# Altium PCB PCB.PcbDoc (part 2 of 2)
Units mil, origin at the board's own origin, x right, y up, seen from the top; angles counter-clockwise.
Board outline 981 x 1306 mil, 4 copper layers (Top Layer, GND, POWER, Bottom Layer), stack 45.84 mil thick; 102 components, 94 nets, 433 pads, 136 vias.
Unrouted connection lines stored in the file: 65.
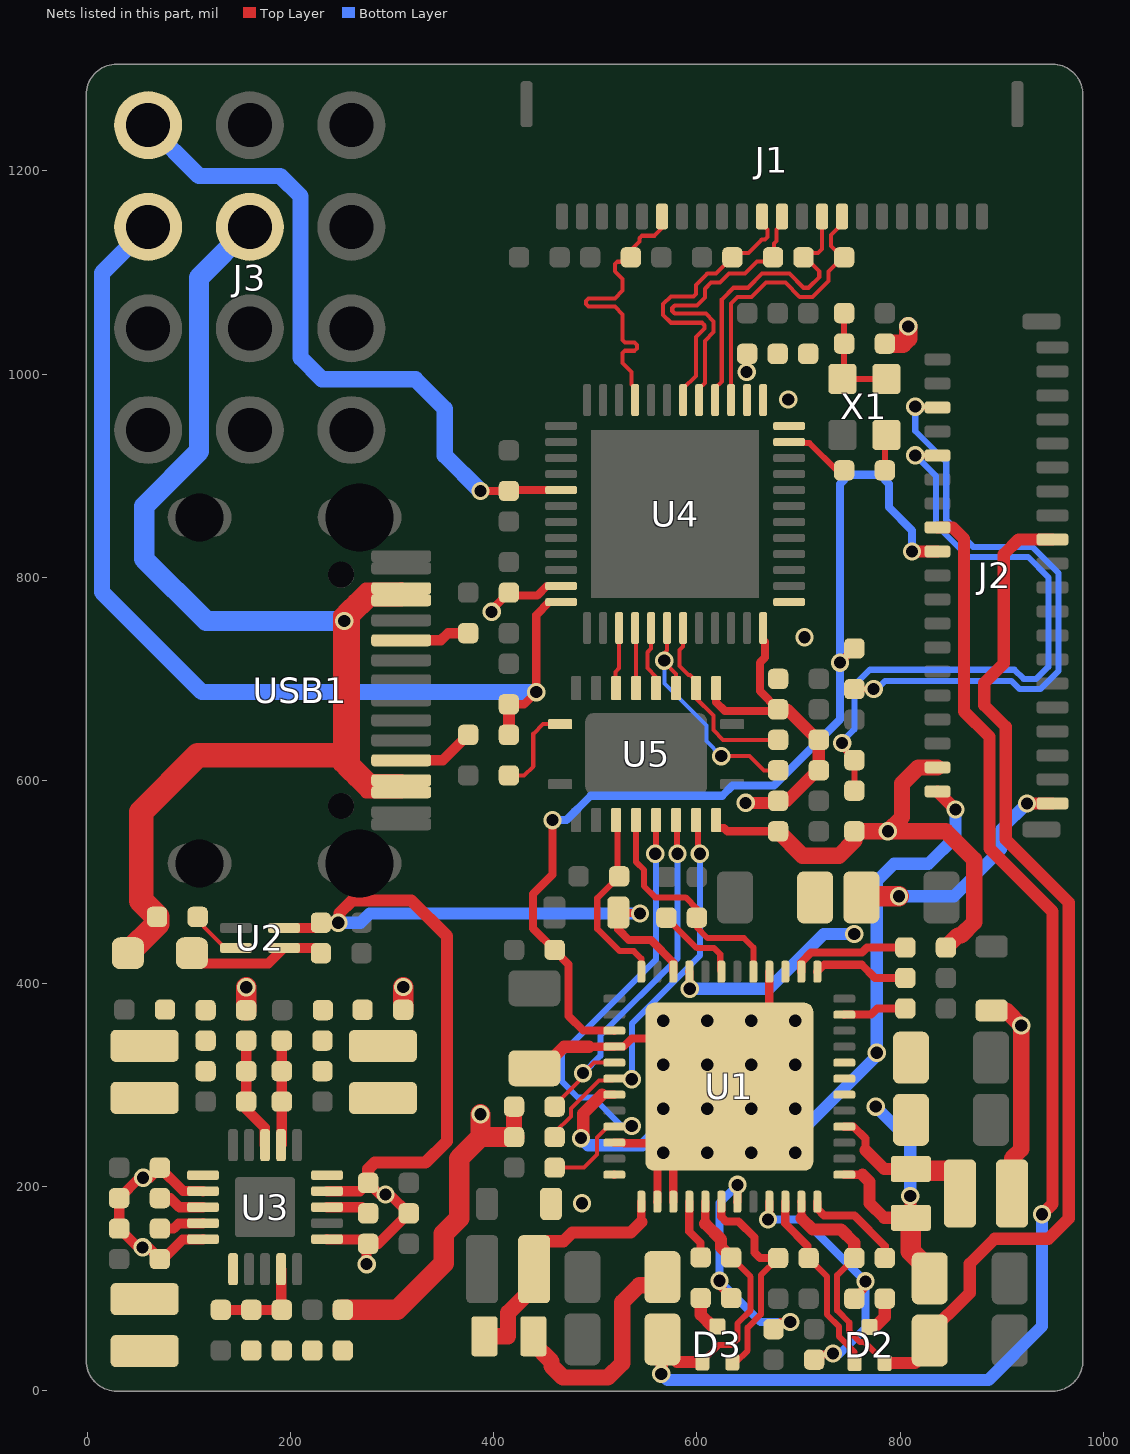
[diagram p4: the nets of this part, all layers, seen from the top]

## Via types
v1: diameter 18, hole 12, Top Layer to Bottom Layer, tented both sides, 98 vias
v2: diameter 19.68, hole 12, Top Layer to Bottom Layer, 38 vias

## Nets (pads, with @x,y where several pads share a name; then routed paths per layer and width w, separated by ;. In a path a pad name is that pad's centre, name@x,y a point inside that pad or via, vN(x,y) a via of type N, cw(c..) or ccw(c..) an arc to the next point about the centre after c; other vN are vias at no path point) (continued)
MIPI_D1_P: J1.17 R26.2 U4.45 | length 302.9
  Top Layer w4: U4.45@539.25,974.41 539.25,986.22 535.88,989.59 535.88,1002.12 527,1011 527,1015 527,1020.6 529.4,1023 538.6,1023 541,1025.4 541,1028.6 538.6,1031 529.4,1031 527,1033.4 527,1034.9 527,1058.8 519.26,1066.54 493.31,1066.54 490.84,1069 490.84,1072.07 493.31,1074.54 519.26,1074.54 527,1082.27 527,1093.72 519.5,1101.22 519.5,1108.26 521.84,1110.6 530.6,1110.6 R26.2@535,1115 535.16,1115 535.16,1121.94 543.7,1130.49 543.7,1133.7 546.2,1136.2 558.2,1136.2 565.68,1143.68 J1.17@565.68,1155
MIPI_D2_N: J1.12 R27.1 U4.42 | length 284.1
  Top Layer w4: U4.42@586.5,985.68 599,998.18 599,1036.46 607.54,1045 607.54,1048.07 605.07,1050.54 574.53,1050.54 566.79,1058.27 566.79,1068.8 574.53,1076.54 596.54,1076.54 599,1079 599,1087.73 610.27,1099 619,1099 R27.1@635,1115 639.4,1119.4 650.77,1119.4 663.91,1132.54 667.11,1132.54 669.45,1134.89 669.45,1142.25 664.11,1147.59 J1.12@664.11,1155
MIPI_D2_P: J1.11 R27.2 U4.41 | length 300
  Top Layer w4: U4.41@602.24,974.41 602.24,985.68 608,991.43 608,1032.73 616.54,1041.27 616.54,1051.8 608.8,1059.54 578.26,1059.54 575.79,1062 575.79,1065.07 578.26,1067.54 600.26,1067.54 607,1074.27 608,1075.27 608,1084 614,1090 622.73,1090 631.73,1099 647.38,1099 659,1110.62 670.62,1110.62 R27.2@675,1115 675.95,1115.95 675.95,1128.66 678.45,1131.16 678.45,1142.25 683.8,1147.59 J1.11@683.8,1155
MIPI_D3_N: J1.9 R28.1 U4.40 | length 295.8
  Top Layer w4: U4.40@617.99,978.84 617.99,986.22 624.54,992.77 624.54,1073.28 636.25,1085 650.27,1085 664.27,1099 691,1099 705,1085 710,1085 720.5,1095.5 720.5,1101 709.4,1112.1 R28.1@709.4,1119.4 ; R28.1@705,1115 R28.1@709.4,1119.4 ; J1.9@723.17,1155 723.17,1123.17 719.4,1119.4 R28.1@709.4,1119.4
MIPI_D3_P: J1.8 R28.2 U4.39 | length 296.4
  Top Layer w4: U4.39@633.74,974.41 633.54,974.61 633.54,1069.56 639.98,1076 654,1076 668,1090 687.27,1090 701.27,1076 713.73,1076 729.5,1091.77 729.5,1101 742.85,1114.35 R28.2@742.85,1115.35 ; R28.2@742.85,1117.5 R28.2@742.85,1115.53 ; J1.8@742.85,1155 742.85,1147.59 732.17,1136.91 732.17,1126.21 R28.2@742.85,1115.53 ; R28.2@742.85,1115.35 R28.2@743.03,1115.35 ; R28.2@742.85,1115.35 R28.2@742.85,1115.53 ; R28.2@742.85,1115.53 R28.2@743.03,1115.35 ; R28.2@743.03,1115.35 743.38,1115 R28.2@745,1115 745,1115.35 R28.2@743.03,1115.35
NetC1_2: C1.2 U1.1 | length 94.8
  Top Layer w8: U1.1@718.56,411.81 725.39,418.64 762.36,418.64 775.4,405.6 C1.2@805.14,405.6
NetC6_2: C6.2 U1.7 | length 85.5
  Top Layer w6: C6.2@570,465 600,435 617,435 623,429 623,412.89 U1.7@624.07,411.81
NetC11_1: C11.1 U1.36 | length 100.4
  Top Layer w8: U1.36@718.56,185.43 718.56,178.67 725.23,172 755,172 785,142 C11.1@785,130
NetC11_2: C11.2 D2.3 | length 37.9
  Top Layer w12: D2.3@770,62.12 775.12,62.12 785,72 785,88 786,89 C11.2@785,90
NetC13_1: C13.1 D2.1 U1.34 | length 186.6
  Top Layer w6: C13.1@710,130 727.99,112.01 727.99,74.41 740,62.4 740,52.63 755.24,37.39 D2.1@755.24,26.68
  Top Layer w8: U1.34@687.07,185.43 687.07,163.93 709,142 C13.1@709,130
NetC15_1: C15.1 D3.2 U1.30 | length 216.4
  Top Layer w6: D3.2@638.36,27.28 650,38.93 650,61.54 662.99,74.53 662.99,99.97 662.99,113 C15.1@679.99,130
  Top Layer w8: U1.30@624.07,185.43 624.01,185.37 624.01,170.69 628.7,166 641,166 656.6,150.4 656.6,135.4 662,130 C15.1@679.99,130
NetC16_1: C16.1 U1.28 | length 59.5
  Top Layer w8: U1.28@592.58,185.43 592.58,156.2 603.78,145 C16.1@603.78,130.6
NetC16_2: C16.2 D3.3 | length 37.5
  Top Layer w12: C16.2@603.78,90.6 603.78,74.22 615.28,62.72 D3.3@620.15,62.72
NetC21_2: C21.2 FB1.1 U2.3 | length 139.6
  Top Layer w10: FB1.1@102.99,430 112.99,420 178.46,420 U2.3@193.62,435.16 224.84,435.16 C21.2@230,430
NetC22_2: C22.2 C23.2 FB2.2 L3.1 R15.2
NetC23_1: C23.1 R15.1 R16.1 U3.14 | length 100.3
  Top Layer w10: R16.1@131.5,78.98 R15.1@161.51,78.98 C23.1@191.52,78.98 191.02,79.47 191.02,118.7 U3.14@190.75,118.98
NetC28_2: C28.2 C29.2 FB3.2 L4.1 R17.2
NetC29_1: C29.1 R17.1 R20.1 U3.3 | length 110.6
  Top Layer w9: U3.3@174.78,241.25 U3.3@175,241.02
  Top Layer w10: C29.1@156.5,344 R17.1@156.5,313.99 R20.1@156.5,283.98 156.5,276.5 174.78,258.22 U3.3@174.78,241.25
NetC30_2: C30.2 C31.2 FB4.2 L5.1 R22.2
NetC31_1: C31.1 R22.1 R25.1 U3.2 | length 103.3
  Top Layer w10: U3.2@190.75,241.02 191.5,241.77 R25.1@191.5,283.98 R22.1@191.5,313.99 C31.1@191.5,344
NetC33_1: C33.1 FB5.1 X1.1 X1.4 | length 108.8
  Top Layer w6: C33.1@745,1060 FB5.1@745,1029.99 745,996.87 X1.1@743.35,995.22 X1.4@786.65,995.22
NetD1_2: D1.2 L1.1 U1.40 | length 156.4
  Top Layer w8: U1.40@745.14,259.25 754.31,259.25 766,247.57 766,236
  Top Layer w12: 766,236 784.4,217.59 D1.2@810.61,217.59
  Top Layer w16: D1.2@810.61,217.59 D1.2@812.27,215.93 ; L1.1@851.21,215.93 858.96,208.18 L1.1@858.96,193.52
  Top Layer w20: D1.2@812.27,215.93 L1.1@851.21,215.93
NetD4_1: D4.1 L2.1 U1.25 | length 255
  Top Layer w8: 545.33,165.33 U1.25@545.33,185.43
  Top Layer w12: L2.1@439.93,119.06 439.93,136.77 449.68,146.52 468.85,146.52 477.32,155 535,155 545.33,165.33
  Top Layer w16: D4.1@390.98,52.99 414.22,52.99 414.22,76.15 439.93,101.86 L2.1@439.93,119.06
NetJ2_30: J2.30 R31.2 R32.2 | length 638.4
  Top Layer w6: v1(743,637) 745.3,634.7 745.3,630.79 755,621.08 R32.2@755,620 R31.2@755,590 ; v1(815,920) v1(815,920) 836.77,919.96 J2.30@836.81,919.92
  Bottom Layer w6: v1(743,637) 743,638.46 755,650.46 755,693.63 770.37,709 912.5,709 912.64,709.13 921.77,700 934,700 946,712 946,800 926,820 867,820 835.5,851.5 835.5,899.5 v1(815,920)
NetJ2_34: J2.34 R33.2 | length 589.8
  Top Layer w6: R33.2@755,690 v1(774,690) ; v1(815,968) 815.42,967.58 836.39,967.58 J2.34@836.81,967.17
  Bottom Layer w6: v1(774,690) 777.25,690 785.25,698 909.63,698 917.63,690 938.14,690 956,707.86 956,804.14 930.14,830 872,830 845.5,856.5 845.5,913.5 815,944 v1(815,968)
NetL3_2: L3.2 U3.11
NetL4_2: L4.2 U3.6
NetL5_2: L5.2 U3.20
NetR1_1: R1.1 U1.2 | length 117.6
  Top Layer w8: U1.2@702.81,411.81 702.81,420.99 712.47,430.64 762.64,430.64 767.61,435.61 R1.1@805.14,435.61
NetR2_2: R2.2 U1.47 | length 62.5
  Top Layer w8: U1.47@745.14,369.49 745.2,369.55 771.55,369.55 777.59,375.59 R2.2@805.14,375.59
NetR6_1: R6.1 R7.2 U1.33 | length 276.5
  Top Layer w8: U1.33@671.32,185.43 U1.33@671.32,185.43 v1@671.26,171.83 ; R7.2@715.43,29.99 720.44,35 v1@736,35 ; R6.1@754.99,90 754.99,90.54 764.09,99.64 764.09,105.09 v1(766,107) ; v1@671.26,171.83 670.07,170.64 v1(670.07,167.93) 671.26,169.12 v1@671.26,171.83
  Bottom Layer w8: v1(670.07,167.93) 705.07,167.93 v1(766,107) 766,61 739.5,34.5 v1@734.25,34.5
  other v1: 734,36
NetR9_1: R9.1 R10.2 U1.31 | length 246.2
  Top Layer w8: v1(622.23,107.6) 624.14,105.69 624.14,100.78 633.79,91.14 R9.1@633.79,90.6 ; U1.31@639.82,185.43 639.89,185.5 639.89,201.89 v1(640,202) ; R10.2@675.43,60 682.43,67 v1(692,67)
  Bottom Layer w8: v1(640,202) 622.23,184.23 v1(622.23,107.6) 662.83,67 v1(692,67)
NetR12_1: R12.1 USB1.A5 | length 68.8
  Top Layer w10: USB1.A5@309.06,737.99 347.99,737.99 355,745 R12.1@375,745
NetR13_2: R13.2 USB1.B5 | length 76.4
  Top Layer w10: USB1.B5@309.06,619.88 350,619.88 350,620 R13.2@375,645
NetR14_1: R14.1 U2.2 | length 52.5
  Top Layer w4: R14.1@108.73,465.75 114.88,459.6 114.88,455.83 135.55,435.16 U2.2@146.38,435.16
NetR18_2: R18.2 U3.9 | length 44.7
  Top Layer w10: R18.2@71.5,158.98 85,158.98 90,163.98 113.7,163.98 U3.9@113.98,164.25
NetR19_2: R19.2 U3.8 | length 46.2
  Top Layer w10: R19.2@71.5,188.99 81.71,188.99 90.69,180 U3.8@113.98,180
NetR21_2: R21.2 U3.18 | length 43
  Top Layer w10: U3.18@236.02,180 270.47,180 R21.2@276.5,173.98
NetR30_2: R30.2 X1.3 | length 35.5
  Top Layer w6: R30.2@785,905.32 785,938.44 X1.3@786.65,940.1
NetR34_1: R34.1 U5.10 | length 90.2
  Top Layer w4: R34.1@415,604.99 429.99,604.99 439,614 439,646 448.55,655.55 U5.10@465.51,655.55
SYS_CLK: R30.1 U4.35 | length 65.7
  Top Layer w6: U4.35@690.83,933.07 691.76,932.13 710.87,932.13 737.68,905.32 R30.1@745,905.32
TPS_PWRUP: R11.1 U1.21 U5.16 | length 486.3
  Top Layer w4: R11.1@460.14,219.02 489.02,219.02 501.93,231.93 501.93,248.77 512.41,259.25 U1.21@518.76,259.25 519.13,259.63 535.63,259.63 v1(536,260)
  Top Layer w6: v1(559,528) 559,529 560,530 560,532 U5.16@560,561.06
  Bottom Layer w6: v1(536,260) 535.79,260.21 525.79,260.21 498,288 483,288 467,304 467,331 560,424 560,527 v1(559,528)
TPS_PWRUP_F: U4.17 U5.5 | length 64.2
  Top Layer w4: U4.17@555,750 555,730 551.24,726.24 551.24,710.76 560,702 U5.5@560,690.98
TPS_SCL: R5.1 U1.17 U5.17 | length 369.8
  Top Layer w4: R5.1@460.14,279.04 460.14,280.67 472,292.53 489.74,310.26 v1@491.87,312.4 ; v1(488,312) 488.72,312 498.97,322.24 U1.17@518.76,322.24 U1.17@518.88,322.12
  Top Layer w6: U5.17@579.69,561.06 580.34,560.41 580.34,528.66 v1(581,528)
  Bottom Layer w6: v1(488,312) 505,329 505,349 581,425 v1(581,528)
TPS_SCL_F: R35.1 U4.18 U5.4 | length 244
  Top Layer w4: U4.18@570.75,750 570.75,728.19 568,725.44 v1(568,718) 568,716.47 579.69,704.79 U5.4@579.69,690.98 ; v1(624,624) 652,624 665.99,610.01 R35.1@680,610.01
  Bottom Layer w4: v1(568,718) 568,695.55 609.31,654.24 609.31,638.69 v1(624,624)
TPS_SDA: R8.1 U1.18 U5.18 | length 391.3
  Top Layer w4: R8.1@460.14,249.03 460.14,253.49 476.14,269.49 476.14,277.11 503.59,304.56 516.82,304.56 U1.18@518.76,306.5 519.01,306.25 535.75,306.25 v1(536,306)
  Top Layer w6: U5.18@599.37,561.06 601.19,559.25 601.19,529.81 v1(603,528)
  Bottom Layer w6: v1(536,306) 536,360.63 603,427.63 v1(603,528)
TPS_SDA_F: R36.1 U4.19 U5.3 | length 184.3
  Top Layer w4: U4.19@586.5,750 586.5,732 583,728.5 583,712.79 591.79,704 593.24,704 599.37,697.87 599.37,680.96 616.2,664.14 616.2,649.52 625.7,640.01 R36.1@680,640.01
TPS_VCOM: R4.1 U1.12 U5.14 | length 185.5
  Top Layer w6: U5.14@520.63,561.06 522.08,559.62 522.08,507.2 R4.1@523.52,505.75 502,484.23 502,454 524,432 538,432 545.33,424.67 U1.12@545.33,411.81
TPS_VCOM_F: U4.15 U5.7 | length 60.7
  Top Layer w4: U5.7@520.63,690.98 520,691.61 520,707 523.5,710.5 U4.15@523.5,750
TPS_WAKEUP: R3.1 U1.5 U5.15 | length 235.5
  Top Layer w6: U5.15@540.32,561.06 540.32,519.68 548,512 548,496 559,485 589,485 600.01,473.99 R3.1@600.01,465 600.01,455.46 610.47,445 646.21,445 655.57,435.64 U1.5@655.57,411.81
TPS_WAKEUP_F: U4.16 U5.6 | length 59.5
  Top Layer w4: U4.16@539.25,750 539.25,741.06 540.32,740 U5.6@540.32,690.98
VB_OUT: C7.1 C9.1 D1.1 U1.37 U1.42 U1.43 | length 287.4
  Top Layer w8: U1.37@745.14,212.01 745.2,211.95 763.06,211.95
  Top Layer w12: 763.06,211.95 770,205 770,184 784.44,169.56 D1.1@810.61,169.56 810.3,169.87 810.3,190.7 v1(810,191)
  Top Layer w16: D1.1@809.92,168.87 D1.1@810.61,169.56
  Top Layer w20: D1.1@810.61,169.56 810.61,136.49 829.22,117.87 C9.1@829.22,110
  Bottom Layer w12: v1(776,279) 810,245 v1(810,191)
VBUS: FB1.2 J3.5 R14.2 USB1.A4 USB1.A9 USB1.B4 USB1.B9 | length 1840.2
  Top Layer w12: USB1.A9@309.06,588.39 308.96,588.48 274.52,588.48 262.8,600.2 ; USB1.A4@309.06,789.17 308.96,789.08 274.08,789.08 262.36,777.36 ; 248,632 248,624.82 248,615 255.18,607.82 ; 248,632 255.18,624.82 ; 248,632 248,746 ; 248,746 248,763 255.18,770.18 ; 248,746 v1@255.18,753.18 ; 255.18,607.82 262.36,600.64 ; 255.18,607.82 255.18,624.82 ; 255.18,624.82 262.36,617.64 ; 255.18,624.82 v1@255.18,753.18 ; v1@255.18,753.18 255.18,770.18 ; v1@255.18,753.18 262.36,760.36 ; 255.18,770.18 262.36,777.36 ; 262.36,600.64 262.8,600.2 ; 262.36,600.64 262.36,617.64 ; 262.36,617.64 262.36,760.36 ; 262.36,617.64 279.71,600.29 308.96,600.29 USB1.B4@309.06,600.2 262.8,600.2 ; 262.36,760.36 279.27,777.27 308.96,777.27 USB1.B9@309.06,777.36 262.36,777.36 ; 262.36,760.36 262.36,777.36
  Top Layer w24: FB1.2@40,430 68.73,458.73 R14.2@68.73,465.75 53,481.48 53,569 108.82,624.82 248,624.82
  Bottom Layer w20: J3.5@160,1145 110,1095 110,924 56,870 56,818 117,757 v1(253,757)
VCC_1V2: C36.2 C38.2 C39.2 FB3.1 U4.11 U4.37 U4.38 | length 105.1
  Top Layer w8: v1(398,766) 398,767.99 C36.2@415,784.99 418,782 442.98,782 452.32,791.34 U4.11@466.42,791.34
  Top Layer w20: FB3.1@156.5,374.01 v1(156.5,396.5)
  other v1: 649,1002
VCC_1V8: C37.2 C40.2 C42.1 FB4.1 J3.4 R34.2 R35.2 R36.2 U4.12 U4.24 U5.2 | length 1365.4
  Top Layer w8: C37.2@415,674.99 429.99,674.99 v1(442,687) 442,763.03 454.56,775.59 U4.12@466.42,775.59 ; U5.2@619.06,690.98 619,690.93 619,677 627.53,668.47 678.45,668.47 C42.1@680,670.02 662,688.02 662,715.96 667,720.96 667,736.55 U4.24@665.3,738.25
  Top Layer w12: R34.2@415,644.99 C37.2@415,674.99 ; v1(648,578) 682,578 C40.2@680,580 688.79,580 720,611.21 R36.2@720,640.01 718.8,640.01 688.79,670.02 C42.1@680,670.02
  Top Layer w20: FB4.1@311,374.35 v1(311,396.84)
  Bottom Layer w16: J3.4@60,1145 14.54,1099.54 14.54,785.46 113,687 v1(442,687)
VCC_3V3: C32.1 C34.2 C35.1 C41.2 FB2.1 FB5.2 J2.4 J3.1 R1.2 R5.2 R8.2 R31.1 U4.5 U4.25 U4.36 U5.19 | length 1549.3
  Top Layer w8: v1(387,885) C34.2@415,885 415.76,885.76 U4.5@466.42,885.83 U4.5@466.42,885.83 ; U5.19@619.06,561.06 619.06,554.17 619.98,553.25 626.87,553.25 630.12,550 C41.2@680,550
  Top Layer w16: R8.2@420.14,249.03 R5.2@420.14,279.04 ; C41.2@680,550 704,526 740,526 755,541 R31.1@755,550 v1(788,550) ; J2.4@836.81,612.83 817.83,612.83 802,597 802,564 v1(788,550) ; R1.2@845.14,435.61 856.93,447.41 859.98,447.41 873,460.43 873,522 845,550 v1(788,550)
  Top Layer w18: FB5.2@785,1029.99 802.99,1029.99 808,1035 v1(808,1047)
  Top Layer w20: FB2.1@251.54,78.98 304.98,78.98 351,125 351,154 366,169 366,228 387.03,249.03 ; v1(387.03,271.52) 387.03,249.03 ; R8.2@420.14,249.03 387.03,249.03
  Bottom Layer w16: J3.1@60,1245 110,1195 190,1195 210,1175 210,1016 231,995 323,995 352,966 352,920 v1(387,885)
  other v1: 706,741 690,975
VCOM: C12.2 J2.22 R33.1 U1.15 | length 998.4
  Top Layer w8: v1(458,561) 458,507.29 438.88,488.18 438.88,454.47 C12.2@460.14,433.22 460.14,432.68 473.73,419.09 473.73,368.27 488.2,353.8 518.7,353.8 U1.15@518.76,353.74 ; v1(741,716) R33.1@755,730
  Top Layer w12: v1(811.81,825.43) J2.22@836.81,825.43
  Bottom Layer w8: v1(458,561) 471.53,561 495.53,585 625,585 635,595 676,595 741,660 v1(741,716) 741,892 750,901 780,901 789,892 789,869 811.81,846.19 v1(811.81,825.43)
VGH: C10.1 D2.2 J2.23 R6.2 U1.35 | length 1242
  Top Layer w6: R6.2@754.99,130 737.99,113 737.99,78.55 750,66.54 750,57.85 760.61,47.24 765.19,47.24 784.76,27.67 D2.2@784.76,26.68
  Top Layer w8: U1.35@702.81,185.43 702.88,185.37 702.88,169.12
  Top Layer w12: 702.88,169.12 714,158 742,158 754.99,145.01 R6.2@754.99,130 ; D2.2@784.76,26.68 814.85,26.68 829.22,41.06 C10.1@829.22,48.82 829.22,56.59 847.04,74.41 847.45,74.41 868.59,95.55 868.59,124.45 893.15,149 946,149 966,169 966,480 904,542 904,653 882.94,674.06 882.94,695.94 902.15,715.15 902.15,822.73 916.57,837.15 949.91,837.15 J2.23@950,837.24
VGL: C19.2 D3.1 J2.24 R9.2 U1.29 | length 1537
  Top Layer w6: D3.1@605.39,27.28 605.39,28.27 621.35,44.23 634.23,44.23 640,50 640,65.68 652.99,78.67 652.99,104.11 652.99,111.4 R9.2@633.79,130.6
  Top Layer w8: 608.33,163.67 U1.29@608.33,185.43
  Top Layer w12: v1(565,16) 565.53,16.53 565.53,49.47 C19.2@566.06,50 566.06,42.23 580.5,27.79 604.88,27.79 D3.1@605.39,27.28 ; 608.33,163.67 623.78,148.22 623.78,140.61 R9.2@633.79,130.6 ; J2.24@836.81,849.06 851.94,849.06 863,838 863,668 888,643 888,533 950,471 950,183.21 v1(939.8,173.01)
  Bottom Layer w12: v1(565,16) 571,10 887,10 939.8,62.8 v1(939.8,173.01)
VIN: C5.1 C8.2 C17.2 C20.1 C24.2 C25.2 C26.2 C27.2 L1.2 R18.1 R19.1 R21.1 U1.10 U1.24 U2.4 U3.7 U3.10 U3.16 U3.19 | length 1559.5
  Top Layer w8: U1.24@518.7,211.95 U1.24@518.76,212.01 ; v1(544,469) 543.5,469.5 524.2,469.5 523.7,469 C8.2@522.7,470 522.7,453.3 533,443 554.82,443 576.77,421.05 576.77,411.87 U1.10@576.83,411.81
  Top Layer w10: U3.10@113.98,148.5 113.7,148.23 94.05,148.23 74.8,128.98 C25.2@71.5,128.98 58.47,142 56.98,140.51 v1(54.51,140.51) 49.96,140.51 R18.1@31.5,158.98 R19.1@31.5,188.99 51.51,209 v1(55,209) 61.5,209 C24.2@71.5,219 94.47,196.02 113.7,196.02 U3.7@113.98,195.75 ; U2.4@193.62,454.84 C20.1@224.84,454.84 ; U3.16@236.02,148.5 236.3,148.23 272.24,148.23 C27.2@276.5,143.98 ; U3.19@236.02,195.75 268.26,195.75 C26.2@276.5,203.99 288.48,192 288.91,192.43 v1(293.5,192.43) 298.04,192.43 R21.1@316.5,173.98 286.5,143.98 C27.2@276.5,143.98 ; v1(275,124) 275,142.48 C27.2@276.5,143.98
  Top Layer w12: C20.1@230,460 v1(247,460) 248.15,461.15 248.15,469.36 260.8,482.02 318.98,482.02 354,447 354,245 332.99,223.99 282.99,223.99 276.5,217.5 C26.2@276.5,203.99
  Top Layer w16: C5.1@890.14,373.57 904.43,373.57 v1(919.22,358.78) 919.22,237.09 910.14,228 L1.2@910.14,193.52
  Bottom Layer w12: v1(247,460) 269,460 278,469 v1(544,469)
  other v1: 487,184
VN_OUT: C3.2 C14.2 C18.2 D4.2 U1.4 U1.16 U1.22 U1.26 U1.27 U1.49 | length 1398.2
  Top Layer w8: 493.99,337.99 U1.16@518.76,337.99 518.82,338.06 528.01,338.06 535.96,346 U1.49@566.99,346 ; U1.22@518.76,243.5 518.82,243.44 528.52,243.44 528.96,243 U1.49@576.33,243 ; U1.26@561.08,185.43 561.15,185.5 561.15,227.82 v2(566.99,233.66) U1.49@576.33,243 ; U1.27@576.83,185.43 U1.49@576.83,243.5 ; v2(653.6,276.97) U1.49@631.95,298.62 ; U1.4@671.32,411.81 U1.49@671.32,363.58 ; v2(696.91,233.66) v2(653.6,233.66) v2(610.3,233.66) 588.64,255.32 v2(566.99,276.97) v2(566.99,320.28) U1.49@566.99,346 ; U1.49@566.99,346 584.57,346 U1.49@631.95,298.62 ; U1.49@566.99,346 v2(566.99,363.58) v2(610.3,363.58) v2(653.6,363.58) U1.49@671.32,363.58 ; U1.49@576.33,243 U1.49@576.83,243.5 ; U1.49@576.83,243.5 v2(610.3,276.97) U1.49@631.95,298.62 ; U1.49@631.95,298.62 675.26,298.62 v2(696.91,276.97) v2(696.91,320.28) v2(696.91,363.58) U1.49@671.32,363.58 ; U1.49@631.95,298.62 v2(653.6,320.28) 671.32,337.99 U1.49@671.32,363.58
  Top Layer w12: C14.2@440.14,316.76 448.12,316.76 469.35,337.99 493.99,337.99
  Top Layer w16: D4.2@439.02,52.99 439.02,46.1 456.95,28.17 456.95,23.72 468.26,12.41 512.41,12.41 526.54,26.54 526.54,86.54 543.3,103.3 566.06,103.3 C18.2@566.06,111.18
  other v2: 610.3,320.28
VNEG: C2.2 J2.1 U1.3 U1.9 | length 439.9
  Top Layer w8: U1.9@592.58,411.81 592.64,411.75 592.64,399.36 593,399 592,398 593,397 v1(593,395)
  Top Layer w12: v1(925,577.4) J2.1@950,577.4
  Top Layer w20: C2.2@761.9,485 762.9,486 v1(799,486)
  Bottom Layer w12: v1(593,395) 671,395 725,449 v1(755,449) ; v1(799,486) 853,486 900,533 900,552.4 v1(925,577.4)
VPOS: C4.1 J2.2 U1.19 U1.44 | length 713.2
  Top Layer w8: 506.69,290.69 U1.19@518.7,290.69
  Top Layer w12: v1(486,248) 488.14,250.14 488.14,272.14 506.69,290.69 ; J2.2@836.81,589.21 v1(854.49,571.53)
  Bottom Layer w12: v1(486,248) 493,241 546.26,241 562.39,257.13 705.13,257.13 777,329 v1(777,332) 777,501 794,518 828,518 854.49,544.49 v1(854.49,571.53)
pads on no net: J1.1 J1.2 J1.3 J1.5 J1.6 J2.8 J2.9 J2.10 J2.20 J2.21 J2.25 J2.26 J2.27 J2.29 J2.31 J2.35 J2.36 J2.37 J2.38 U1.11 U1.13 U1.20 U1.23 U1.38 U1.39 U1.45 U1.46 U5.1 U5.20 USB1.0 USB1.A6 USB1.A7 USB1.A8 USB1.B6 USB1.B7 USB1.B8

## Polygon pours and split planes (outlines as drawn)
GND on Top Layer "GND_L01_P047" (solid, remove dead copper, pour order 47): -1,29 -1,1275.48 cw(c29.01,1274.99) 29.5,1305 950,1305 cw(c950,1275) 980,1275 980,30.03 cw(c949.97,29.03) 950.97,-1 29,-1 cw(c29.01,29.01)
NetC22_2 on Top Layer "NETC22_2_L01_P041" (solid, pour order 41): 27,5 20,12 20,51 26,57 256,57 264,49 264,14 255,5
VIN on Top Layer "VIN_L01_P045" (solid, pour order 45): 509,217 494,202 447,202 443,198 443,169 447,165 523,165 531,173 531,214 528,217
NetL5_2 on Top Layer "NETL5_2_L01_P033" (solid, pour order 33): 222,206 217,211 217,253 232,268 242,268 248,274 248,301 254,307 322,307 328,301 328,244 320,236 275,236 258,219 258,211 253,206
NetC30_2 on Top Layer "NETC30_2_L01_P039" (solid, pour order 39): 241,303 258,320 323,320 328,325 328,354 325,357 291,357 284,364 284,383 280,387 223,387 218,382 218,307 222,303
NetC28_2 on Top Layer "NETC28_2_L01_P037" (solid, pour order 37): 107,303 90,320 25,320 20,325 20,354 23,357 57,357 64,364 64,383 68,387 125,387 130,382 130,307 126,303
NetL3_2 on Top Layer "NETL3_2_L01_P035" (solid, pour order 35): 146,136 149,133 149,100 145,96 118,96 114,92 114,75 110,71 25,71 20,76 20,107 26,113 84,113 88,117 88,125 99,136
NetL4_2 on Top Layer "NETL4_2_L01_P031" (solid, pour order 31): 99,206 88,217 88,229 81,236 26,236 20,242 20,302 25,307 89,307 98,298 98,260 133,225 133,209 130,206
GND on Top Layer "GND_L01_P029" (solid, pour order 29): 140,225 106,259 106,291 110,295 123,295 127,291 127,279 148,258 162,258 165,255 165,227 163,225
VPOS on Top Layer "VPOS_L01_P025" (solid, pour order 25): 736,327 757,327 762,332 762,349 769,356 825,356 830,351 830,305 824,299 792,299 774,317 736,317 734,319 734,325
VN_OUT on Top Layer "VN_OUT_L01_P023" (solid, pour order 23): 556,159 547,150 547,89 551,85 581,85 585,89 585,168 581,172 581,196 580,197 558,197 556,195
VNEG on Top Layer "VNEG_L01_P017" (solid, pour order 17): 683,402 683,428 705,450 731,450 741,460 741,508 746,513 778,513 782,509 782,462 759,439 709,439 691,421 691,402
VB_OUT on Top Layer "VB_OUT_L01_P021" (solid, pour order 21): 736,312 772,312 789,295 823,295 830,288 830,244 825,239 788,239 762,265 762,280 756,286 736,286 734,288 734,310
VN_OUT on Top Layer "VN_OUT_L01_P015" (solid, pour order 15): 667,402 667,479 695,507 701,513 732,513 737,508 737,463 729,455 704,455 676,427 676,402
VCC_3V3 on Top Layer "VCC_3V3_L01_P013" (solid, pour order 13): 677,780 675,778 675,717 670,712 670,692 673,689 689,689 693,693 693,711 718,736 718,772 710,780
VCC_3V3 on Top Layer "VCC_3V3_L01_P007" (solid, pour order 7): 675,945 675,985 700,1010 700,1025 705,1030 715,1030 720,1025 720,998 707,985 707,947 705,945
VCC_1V2 on Top Layer "VCC_1V2_L01_P002" (solid, pour order 2): 645,960 645,990 640,995 640,1025 645,1030 685,1030 690,1025 690,1010 670,990 670,960
GND on Bottom Layer "GND_L04_P049" (solid, remove dead copper, pour order 49): 0,30 0,1275 cw(c30,1275) 30,1305 950,1305 cw(c950,1275) 980,1275 980,30 cw(c950,30) 950,0 30,0 cw(c30,30)
GND on GND (split plane): 29,1300.92 950,1300.92 950.14,1300.95 950.29,1300.93 950.36,1300.95 954.06,1300.66 958.03,1299.71 961.79,1298.15 965.27,1296.02 968.37,1293.37 971.02,1290.27 973.15,1286.79 974.71,1283.03 975.66,1279.06 975.96,1275.21 975.92,1275 975.92,29 975.96,28.79 975.66,24.94 974.71,20.97 973.15,17.21 971.02,13.73 968.37,10.63 965.27,7.98 961.79,5.85 958.03,4.29 954.06,3.34 950.21,3.04 950,3.08 29,3.08 28.79,3.04 24.94,3.34 20.97,4.29 17.21,5.85 13.73,7.98 10.63,10.63 7.98,13.73 5.85,17.21 4.29,20.97 3.34,24.94 3.04,28.79 3.08,29 3.08,1275 3.04,1275.21 3.34,1279.06 4.29,1283.03 5.85,1286.79 7.98,1290.27 10.63,1293.37 13.73,1296.02 17.21,1298.15 20.97,1299.71 24.94,1300.66 28.79,1300.96
VIN on POWER (split plane): 975.92,29 975.96,28.79 975.66,24.94 974.71,20.97 973.15,17.21 971.02,13.73 968.37,10.63 965.27,7.98 961.79,5.85 958.03,4.29 954.06,3.34 950.21,3.04 950,3.08 29,3.08 28.79,3.04 24.94,3.34 20.97,4.29 17.21,5.85 13.73,7.98 10.63,10.63 7.98,13.73 5.85,17.21 4.29,20.97 3.34,24.94 3.04,28.79 3.08,29 3.08,362.91 99.82,362.91 128.87,333.87 130.96,332.26 133.39,331.26 136,330.91 210,330.91 212.61,331.26 215.04,332.26 217.13,333.87 245.18,361.91 342.91,361.91 342.91,257 343.26,254.39 344.26,251.96 345.87,249.87 367.87,227.87 369.96,226.26 372.39,225.26 375,224.91 498,224.91 500.61,225.26 503.04,226.26 505.13,227.87 535.13,257.87 536.74,259.96 537.74,262.39 538.09,265 538.09,325.82 632.18,419.91 742,419.91 744.61,420.26 747.04,421.26 749.13,422.87 844.18,517.91 975.92,517.91
VCC_1V2 on POWER (split plane): 662.91,1013.56 662.91,985.18 636.64,958.9 634.61,959.74 632,960.09 536,960.09 533.39,959.74 530.96,958.74 528.87,957.13 506.87,935.13 505.26,933.04 504.26,930.61 503.91,928 503.91,801.76 233.87,531.71 232.26,529.63 231.26,527.19 230.91,524.58 230.91,376.18 205.82,351.09 140.18,351.09 114.09,377.18 114.09,518.82 393.13,797.87 425.13,829.87 426.74,831.96 427.74,834.39 428.09,837 428.09,923.82 538.18,1033.91 642.56,1033.91
GND on POWER (split plane): 29,1300.92 950,1300.92 950.14,1300.95 950.29,1300.93 950.36,1300.95 954.06,1300.66 958.03,1299.71 961.79,1298.15 965.27,1296.02 968.37,1293.37 971.02,1290.27 973.15,1286.79 974.71,1283.03 975.66,1279.06 975.96,1275.21 975.92,1275 975.92,538.09 850.09,538.09 850.09,1057 849.74,1059.61 849.45,1060.32 848.73,1062.04 847.13,1064.13 750.13,1161.13 748.04,1162.74 745.61,1163.74 743,1164.09 488,1164.09 485.39,1163.74 483.67,1163.03 482.96,1162.74 480.87,1161.13 305.87,986.13 304.26,984.04 303.26,981.61 302.91,979 302.91,829 303.26,826.39 304.26,823.96 305.87,821.87 347.24,780.5 96.87,530.13 95.26,528.04 94.26,525.61 93.91,523 93.91,383.09 3.08,383.09 3.08,1275 3.04,1275.21 3.34,1279.06 4.29,1283.03 5.85,1286.79 7.98,1290.27 10.63,1293.37 13.73,1296.02 17.21,1298.15 20.97,1299.71 24.94,1300.66 28.79,1300.96
VCC_3V3 on POWER (split plane): 829.91,1052.82 829.91,532.18 737.82,440.09 628,440.09 625.39,439.74 623.67,439.03 622.96,438.74 620.87,437.13 520.87,337.13 519.26,335.04 518.26,332.61 517.91,330 517.91,269.18 493.82,245.09 379.18,245.09 363.09,261.18 363.09,367.82 454.18,458.91 545,458.91 547.61,459.26 550.04,460.26 552.13,461.87 623.18,532.91 655,532.91 657.61,533.26 660.04,534.26 662.13,535.87 684.13,557.87 685.74,559.96 686.74,562.39 687.09,565 687.09,763.83 686.74,766.44 685.74,768.87 684.13,770.96 653.67,801.42 653.67,938.42 653.33,941.03 653.03,941.74 652.32,943.46 651.19,944.93 680.13,973.87 681.74,975.96 682.24,977.17 682.74,978.39 683.09,981 683.09,1017.74 682.74,1020.35 682.03,1022.07 681.74,1022.78 680.13,1024.87 653.87,1051.13 651.78,1052.74 649.35,1053.74 646.74,1054.09 534,1054.09 531.39,1053.74 529.67,1053.03 528.96,1052.74 526.87,1051.13 410.87,935.13 409.26,933.04 408.26,930.61 407.91,928 407.91,841.18 378.87,812.13 361.5,794.76 323.09,833.18 323.09,974.82 492.18,1143.91 738.82,1143.91
GND on POWER (split plane): 629.87,937.87 633.5,934.24 633.5,807.33 524.09,807.33 524.09,923.82 540.18,939.91 628.3,939.91
VCC_1V8 on POWER (split plane): 666.91,759.65 666.91,569.18 650.82,553.09 619,553.09 616.39,552.74 613.96,551.74 611.87,550.13 540.82,479.09 450,479.09 447.39,478.74 446.68,478.45 444.96,477.74 442.87,476.13 348.82,382.09 251.09,382.09 251.09,520.4 517.84,787.16 639.4,787.16

## Keep-outs
Top Layer:
  rectangle: 259,311 323,315
  rectangle: 25,311 88,316
  rectangle: 25,61 88,67
  rectangle: 728,924 802,1011
  rectangle: 370.2,83 459.2,156
  rectangle: 840,157 929,230

## Other copper
POWER (plane layer: these items are gaps in the copper):
  lines w20: 0,373 104,373 ; 362,781 361,781 313,829 313,979 488,1154 743,1154 840,1057 840,528 ; 513.66,797.24 643.58,797.24 ; 632,950 536,950 514,928 514,797.58 241,524.58 241,372 ; 980,528 840,528 ; 104,373 104,523 386,805 418,837 418,928 534,1044 646.74,1044 673,1017.74 673,981 637,945 643.58,938.42 643.58,797.24 ; 104,373 136,341 210,341 241,372 ; 241,372 353,372 ; 353,372 353,257 375,235 498,235 528,265 528,330 628,430 742,430 840,528 ; 353,372 450,469 545,469 619,543 655,543 677,565 677,763.83 643.58,797.24

## Silkscreen, mask and mechanical layers (free items; w line width, h text height)
Top Overlay:
  text "MIPI" at 380,1290 h60 r270
  text "EPD" at 845,1075 h60
  text "JTAG" at 320,1020 h60 r270
  text "FPGA" at 729,865 h60 r270
  text "POWER" at 355,437 h60 r270
Mechanical 1:
  the board outline again, w4